# EAGLE board TQFP290 (EAGLE 6.6.0)
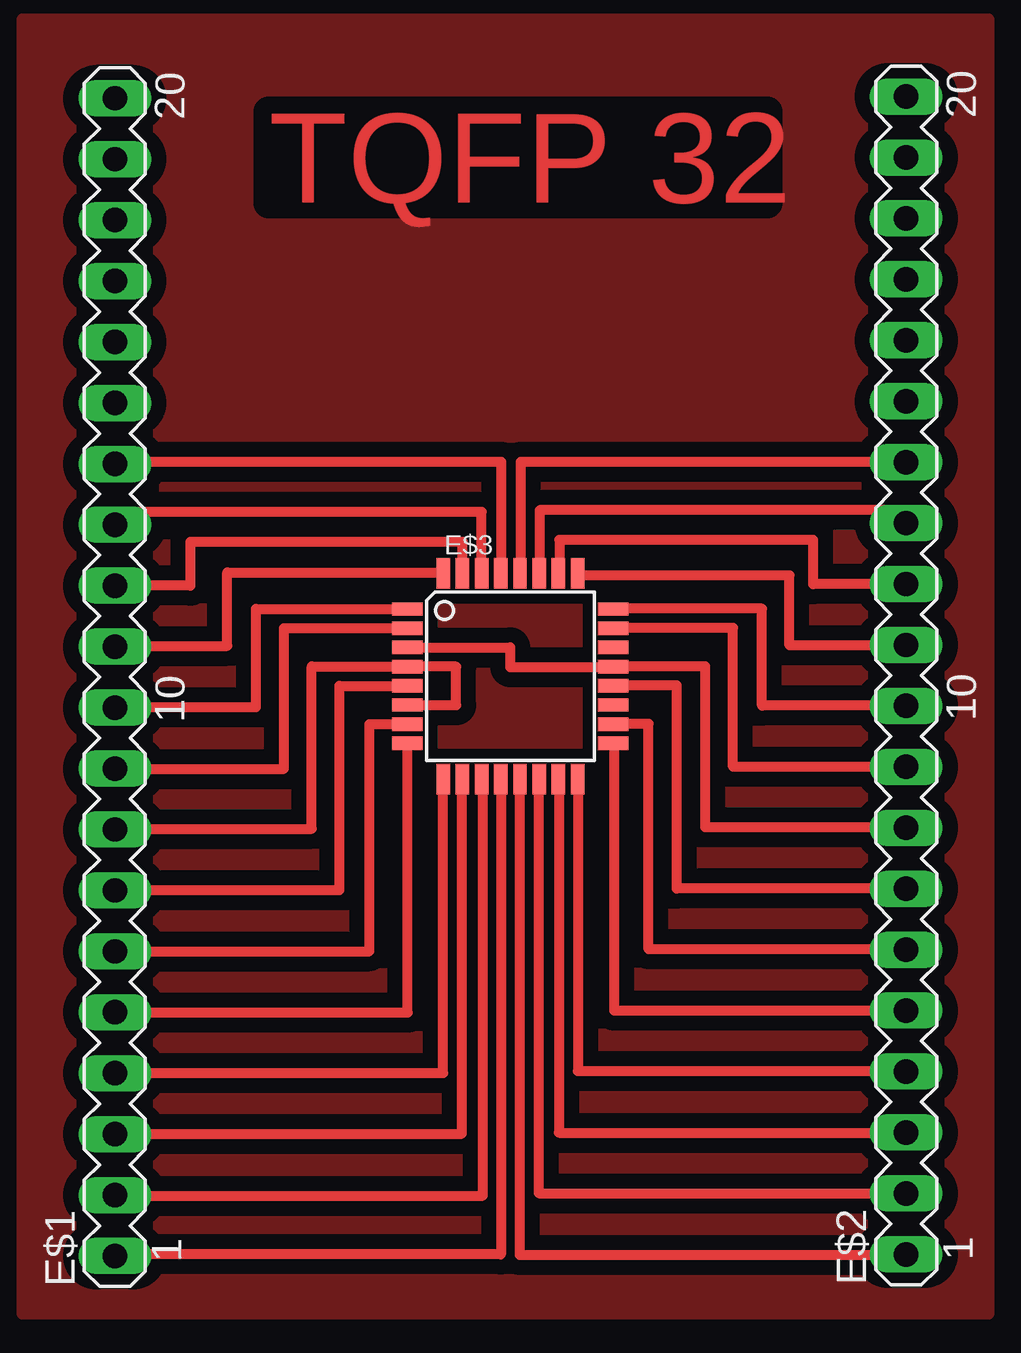
[diagram p0: board, top side]

No outline drawn. Coordinates in mm, seen from the top.
Copper layers (1*16): Top 0.035mm / dielectric 1.5mm / Bottom 0.035mm
Design rules "default *": minimum track width 10mil, minimum drill 24mil, track to track 25mil, track to pad 25mil, pad to pad 25mil, via to via 25mil, smd to smd 25mil, copper to edge 40mil, drill to drill 8mil, minimum pad ring 10mil, minimum via ring 8mil, stop-mask expansion 4mil, vias tented up to drill 0mil, thermal gap 10mil

## Footprints (pad centres in the part's own frame; a part is rotated, then mirrored left to right if it is on the bottom)
MA20-1 = drill 1.016 long: 1 -24.13,0; 2 -21.59,0; 3 -19.05,0; 4 -16.51,0; 5 -13.97,0; 6 -11.43,0; 7 -8.89,0; 8 -6.35,0; 9 -3.81,0; 10 -1.27,0; 11 1.27,0; 12 3.81,0; 13 6.35,0; 14 8.89,0; 15 11.43,0; 16 13.97,0; 17 16.51,0; 18 19.05,0; 19 21.59,0; 20 24.13,0
TQFP32-08 = smd 1.27 x 0.559: 1 -4.293,2.8; 2 -4.293,2; 3 -4.293,1.2; 4 -4.293,0.4; 5 -4.293,-0.4; 6 -4.293,-1.2; 7 -4.293,-2; 8 -4.293,-2.8; 17 4.293,-2.8; 18 4.293,-2; 19 4.293,-1.2; 20 4.293,-0.4; 21 4.293,0.4; 22 4.293,1.2; 23 4.293,2; 24 4.293,2.8 | smd 0.559 x 1.27: 9 -2.8,-4.293; 10 -2,-4.293; 11 -1.2,-4.293; 12 -0.4,-4.293; 13 0.4,-4.293; 14 1.2,-4.293; 15 2,-4.293; 16 2.8,-4.293; 25 2.8,4.293; 26 2,4.293; 27 1.2,4.293; 28 0.4,4.293; 29 -0.4,4.293; 30 -1.2,4.293; 31 -2,4.293; 32 -2.8,4.293

## Placement (x,y rotation side)
E$1  [MA20-1]  3.87,26.54 90 top
E$2  [MA20-1]  36.86,26.61 90 top
E$3  [TQFP32-08]  20.36,26.58 0 top

## Library data of the parts
E$1 E$2 = con-lstb
E$3 = atmel

## Tracks (layer width: path | path; a pad name or v marks a point on that pad's centre or on a via)
S$1
  Top 0.406: 20.75,22.24 20.75,2.46 36.91,2.46
S$2
  Top 0.406: 21.54,22.24 21.54,5.03 36.96,5.03
S$3
  Top 0.406: 22.38,22.24 22.38,7.55 36.91,7.55
S$4
  Top 0.406: 23.17,22.3 23.17,10.12 36.91,10.12
S$5
  Top 0.406: 24.68,23.77 24.68,12.64 36.9,12.64
S$6
  Top 0.406: 36.87,15.2 26.12,15.2 26.12,24.59 24.72,24.59
S$7
  Top 0.406: 36.91,17.73 27.3,17.73 27.3,26.2 24.68,26.2
S$8
  Top 0.406: 36.89,20.28 28.48,20.28 28.48,26.99 24.88,26.99
S$9
  Top 0.406: 36.89,22.8 29.64,22.8 29.64,28.59 24.66,28.59
S$10
  Top 0.406: 36.89,25.35 30.85,25.35 30.85,29.39 24.73,29.39
S$11
  Top 0.406: 36.85,27.86 32,27.86 32,30.78 23.11,30.78
S$12
  Top 0.406: 36.87,30.41 32.99,30.41 32.99,32.26 22.4,32.26 22.4,30.59
S$13
  Top 0.406: 36.9,33.5 21.58,33.5 21.58,30.77
S$14
  Top 0.406: 36.87,35.51 20.79,35.51 20.79,30.56
S$15
  Top 0.406: 19.99,30.81 19.99,35.51 3.87,35.51
S$16
  Top 0.406: 19.16,30.85 19.16,33.43 3.72,33.43
S$17
  Top 0.406: 19.96,22.28 19.96,2.48 3.84,2.48
S$18
  Top 0.406: 3.88,4.93 19.21,4.93 19.21,22.28
S$19
  Top 0.406: 3.88,7.51 18.34,7.51 18.34,22.5
S$20
  Top 0.406: 3.88,10.04 17.56,10.04 17.56,22.41
S$21
  Top 0.406: 3.88,12.56 16.08,12.56 16.08,23.82
S$22
  Top 0.406: 3.88,15.11 14.48,15.11 14.48,24.58 16.37,24.58
S$23
  Top 0.406: 15.98,25.37 18.1,25.37 18.1,26.98 15.93,26.98
S$24
  Top 0.406: 3.86,17.66 13.24,17.66 13.24,26.18 16.48,26.18
S$25
  Top 0.406: 3.89,20.22 12.08,20.22 12.08,26.99 16.51,26.99
S$26
  Top 0.406: 16.16,27.78 20.35,27.78 20.35,26.96 24.74,26.96
S$27
  Top 0.406: 3.82,22.72 10.92,22.72 10.92,28.58 16.48,28.58
S$28
  Top 0.406: 3.9,25.29 9.76,25.29 9.76,29.38 16.46,29.38
S$29
  Top 0.406: 3.86,27.84 8.56,27.84 8.56,30.9 17.59,30.9
S$30
  Top 0.406: 18.37,30.81 18.37,32.18 7.02,32.18 7.02,30.35 3.88,30.35
S$31
  pour Top: 0,-0.03 0,54 38.81,54 40.32,54 40.32,1.79 40.32,-0.03

## Text on the board
Top: TQFP 32